# Altium PCB 8x8v2.PcbDoc (part 3 of 3)
Units mil, origin at the board's own origin, x right, y up, seen from the top; angles counter-clockwise.
Board outline 3661.42 x 3661.42 mil, 4 copper layers (Top Layer, VCC Plane, GND Plane, Bottom Layer), stack 30.635 mil thick; 389 components, 265 nets, 1171 pads, 321 vias.
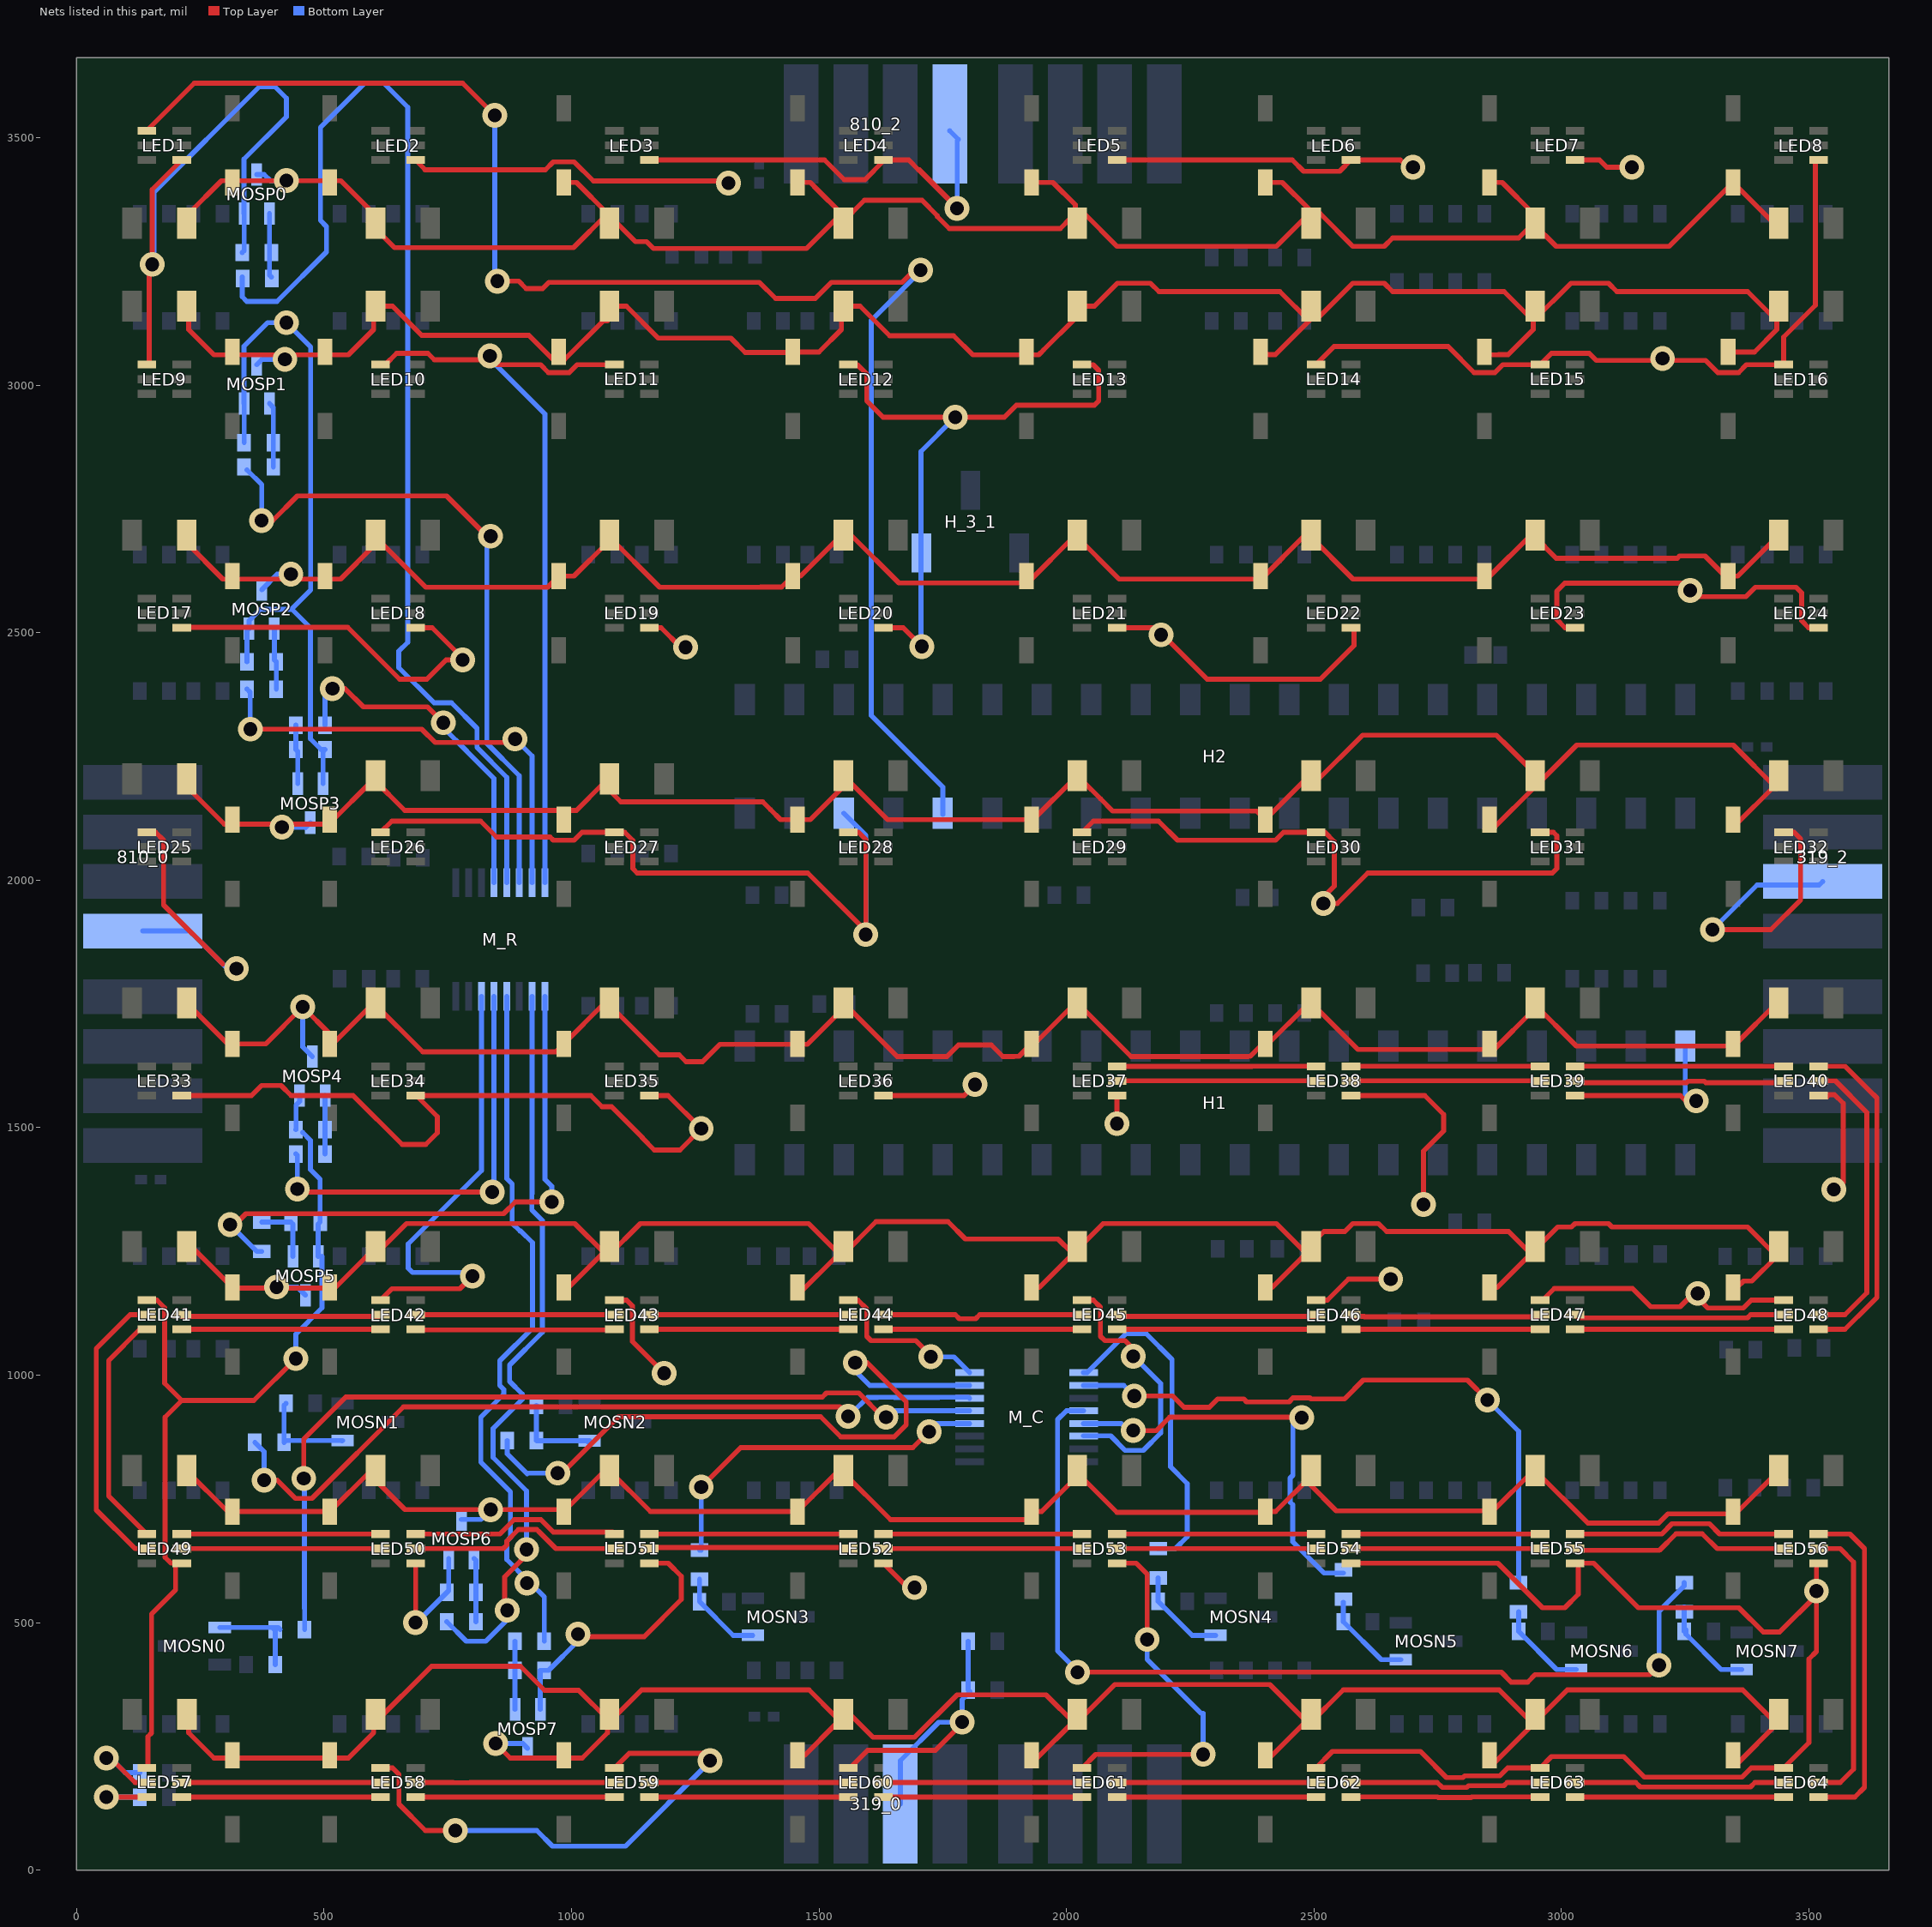
[diagram p5: the nets of this part, all layers, seen from the top]

## Via types
v1: diameter 50, hole 28, Top Layer to Bottom Layer, 321 vias

## Nets (pads, with @x,y where several pads share a name; then routed paths per layer and width w, separated by ;. In a path a pad name is that pad's centre, name@x,y a point inside that pad or via, vN(x,y) a via of type N, cw(c..) or ccw(c..) an arc to the next point about the centre after c; other vN are vias at no path point) (continued)
NetLED37_CKO: LED37.CKO LED38.CKI | length 401.6
  Top Layer w10: LED37.CKO@2102.36,1594.49 LED38.CKI@2503.94,1594.49
NetLED37_SDO: LED37.SDO LED38.SDI | length 401.8
  Top Layer w10: LED37.SDO@2102.36,1624.02 2102.68,1623.7 2374.77,1623.7 2375.09,1624.02 LED38.SDI@2503.94,1624.02
NetLED38_CKO: LED38.CKO LED39.CKI | length 381.9
  Top Layer w10: LED38.CKO@2574.8,1594.49 LED39.CKI@2956.7,1594.49
NetLED38_SDO: LED38.SDO LED39.SDI | length 381.9
  Top Layer w10: LED38.SDO@2574.8,1624.02 LED39.SDI@2956.7,1624.02
NetLED39_CKO: LED39.CKO LED40.CKI | length 426.7
  Top Layer w10: LED39.CKO@3027.56,1594.49 3031.06,1590.98 3252.42,1590.98 3255.43,1594 3288.57,1594 3291.58,1590.98 3445.32,1590.98 LED40.CKI@3448.82,1594.49
NetLED39_SDO: LED39.SDO LED40.SDI | length 421.3
  Top Layer w10: LED39.SDO@3027.56,1624.02 LED40.SDI@3448.82,1624.02
NetLED40_CKO: LED40.CKO LED48.CKI | length 603.7
  Top Layer w10: LED48.CKI@3519.68,1122.05 3572.62,1122.05 3617,1166.43 3617,1530.64 3553.15,1594.49 LED40.CKO@3519.68,1594.49
NetLED40_SDO: LED40.SDO LED48.SDI | length 691
  Top Layer w10: LED48.SDI@3519.68,1092.52 3572.83,1092.52 3622.05,1141.73 3637,1156.68 3637,1559.85 3622.05,1574.8 3572.83,1624.02 LED40.SDO@3519.68,1624.02
NetLED41_CKI: LED41.CKI LED42.CKO | length 406.1
  Top Layer w10: LED41.CKI@212.6,1122.05 212.6,1118.86 610.99,1118.86 LED42.CKO@614.18,1122.05
NetLED41_CKO: LED41.CKO LED49.CKI | length 590.2
  Top Layer w10: LED49.CKI@141.74,649.61 118.11,649.61 40,727.72 40,1053.78 108.27,1122.05 LED41.CKO@141.74,1122.05
NetLED41_SDI: LED41.SDI LED42.SDO | length 401.6
  Top Layer w10: LED41.SDI@212.6,1092.52 LED42.SDO@614.18,1092.52
NetLED41_SDO: LED41.SDO LED49.SDI | length 485
  Top Layer w10: LED49.SDI@141.74,679.14 65,755.87 65,1029.57 127.95,1092.52 LED41.SDO@141.74,1092.52
NetLED42_CKI: LED42.CKI LED43.CKO | length 406.1
  Top Layer w10: LED42.CKI@685.04,1122.05 685.04,1118.86 694.89,1118.86 698.08,1122.05 LED43.CKO@1086.62,1122.05
NetLED42_SDI: LED42.SDI LED43.SDO | length 402.4
  Top Layer w10: LED42.SDI@685.04,1092.52 685.98,1091.58 1085.68,1091.58 LED43.SDO@1086.62,1092.52
NetLED43_CKI: LED43.CKI LED44.CKO | length 401.6
  Top Layer w10: LED43.CKI@1157.48,1122.05 LED44.CKO@1559.06,1122.05
NetLED43_SDI: LED43.SDI LED44.SDO | length 401.6
  Top Layer w10: LED43.SDI@1157.48,1092.52 LED44.SDO@1559.06,1092.52
NetLED44_CKI: LED44.CKI LED45.CKO | length 408.2
  Top Layer w10: LED44.CKI@1629.92,1122.05 1775.38,1122.05 1783.43,1114 1816.57,1114 1824.62,1122.05 LED45.CKO@2031.5,1122.05
NetLED44_SDI: LED44.SDI LED45.SDO | length 387.9
  Top Layer w10: LED44.SDI@1643.62,1092.52 LED45.SDO@2031.5,1092.52
NetLED45_CKI: LED45.CKI LED46.CKO | length 406.1
  Top Layer w10: LED45.CKI@2102.36,1122.05 2102.36,1118.86 2500.75,1118.86 LED46.CKO@2503.94,1122.05
NetLED45_SDI: LED45.SDI LED46.SDO | length 401.6
  Top Layer w10: LED45.SDI@2102.36,1092.52 LED46.SDO@2503.94,1092.52
NetLED46_CKI: LED46.CKI LED47.CKO | length 387.1
  Top Layer w10: LED46.CKI@2574.8,1122.05 2574.8,1118.86 2601.29,1118.86 2602.15,1118 2952.65,1118 LED47.CKO@2956.7,1122.05
NetLED46_SDI: LED46.SDI LED47.SDO | length 381.9
  Top Layer w10: LED46.SDI@2574.8,1092.52 LED47.SDO@2956.7,1092.52
NetLED47_CKI: LED47.CKI LED48.CKO | length 426.6
  Top Layer w10: LED47.CKI@3027.56,1122.05 3034.01,1115.59 3375.72,1115.59 3382.18,1122.05 LED48.CKO@3448.82,1122.05
NetLED47_SDI: LED47.SDI LED48.SDO | length 421.3
  Top Layer w10: LED47.SDI@3027.56,1092.52 LED48.SDO@3448.82,1092.52
NetLED49_CKO: LED49.CKO LED50.CKI | length 401.6
  Top Layer w10: LED49.CKO@212.6,649.61 LED50.CKI@614.18,649.61
NetLED49_SDO: LED49.SDO LED50.SDI | length 401.6
  Top Layer w10: LED49.SDO@212.6,679.14 LED50.SDI@614.18,679.14
NetLED50_CKO: LED50.CKO LED51.CKI | length 438.1
  Top Layer w10: LED50.CKO@685.04,649.61 862.04,649.61 869,656.57 869,664.57 892.43,688 929.83,688 934.49,683.34 968.22,649.61 LED51.CKI@1086.62,649.61
NetLED50_SDO: LED50.SDO LED51.SDI | length 425.5
  Top Layer w10: LED50.SDO@685.04,679.14 855.28,679.14 884.15,708 938.11,708 954.49,691.62 963.27,682.83 1082.92,682.83 LED51.SDI@1086.62,679.14
NetLED51_CKO: LED51.CKO LED52.CKI | length 403.6
  Top Layer w10: LED51.CKO@1157.48,649.61 1159.87,652 1556.66,652 LED52.CKI@1559.06,649.61
NetLED51_SDO: LED51.SDO LED52.SDI | length 401.6
  Top Layer w10: LED51.SDO@1157.48,679.14 LED52.SDI@1559.06,679.14
NetLED52_CKO: LED52.CKO LED53.CKI | length 401.6
  Top Layer w10: LED52.CKO@1629.92,649.61 LED53.CKI@2031.5,649.61
NetLED52_SDO: LED52.SDO LED53.SDI | length 401.6
  Top Layer w10: LED52.SDO@1629.92,679.14 LED53.SDI@2031.5,679.14
NetLED53_CKO: LED53.CKO LED54.CKI | length 401.6
  Top Layer w10: LED53.CKO@2102.36,649.61 LED54.CKI@2503.94,649.61
NetLED53_SDO: LED53.SDO LED54.SDI | length 401.6
  Top Layer w10: LED53.SDO@2102.36,679.14 LED54.SDI@2503.94,679.14
NetLED54_CKO: LED54.CKO LED55.CKI | length 381.9
  Top Layer w10: LED54.CKO@2574.8,649.61 LED55.CKI@2956.7,649.61
NetLED54_SDO: LED54.SDO LED55.SDI | length 381.9
  Top Layer w10: LED54.SDO@2574.8,679.14 LED55.SDI@2956.7,679.14
NetLED55_CKO: LED55.CKO LED56.CKI | length 449.2
  Top Layer w10: LED55.CKO@3027.56,649.61 3031.06,646.1 3197.8,646.1 3231.46,679.76 3284.28,679.76 3314.44,649.61 LED56.CKI@3448.82,649.61
NetLED55_SDO: LED55.SDO LED56.SDI | length 438.4
  Top Layer w10: LED55.SDO@3027.56,679.14 3202.55,679.14 3223.18,699.76 3298.71,699.76 3319.34,679.14 LED56.SDI@3448.82,679.14
NetLED56_CKO: LED56.CKO LED64.CKI | length 581.4
  Top Layer w10: LED64.CKI@3519.68,177.17 3562.99,177.17 3590,204.17 3590,622.6 3562.99,649.61 LED56.CKO@3519.68,649.61
NetLED56_SDO: LED56.SDO LED64.SDI | length 687.6
  Top Layer w10: LED64.SDI@3519.68,147.64 3592.52,147.64 3612.07,167.19 3612.07,649.74 3582.68,679.14 LED56.SDO@3519.68,679.14
NetLED57_CKI: LED57.CKI LED58.CKO | length 401.6
  Top Layer w10: LED57.CKI@212.6,177.17 LED58.CKO@614.18,177.17
NetLED57_CKO: LED57.CKO ROUT0.2 | length 164.5
  Top Layer w10: v1@68.9,226.38 118.11,177.17 LED57.CKO@141.74,177.17
  Bottom Layer w10: v1@68.9,226.38 98.42,196.85 ROUT0.2@127.95,196.85
  other v1: 60,226.38
NetLED57_SDI: LED57.SDI LED58.SDO | length 401.6
  Top Layer w10: LED57.SDI@212.6,147.64 LED58.SDO@614.18,147.64
NetLED57_SDO: LED57.SDO ROUT1.2 | length 151.6
  Top Layer w10: v1@59.06,147.64 LED57.SDO@141.74,147.64
  Bottom Layer w10: v1@59.06,147.64 v1(60,147.64) ROUT1.2@127.95,147.64
NetLED58_CKI: LED58.CKI LED59.CKO | length 402.1
  Top Layer w10: LED58.CKI@685.04,177.17 760.36,177.17 760.99,176.54 794.13,176.54 794.76,177.17 LED59.CKO@1086.62,177.17
NetLED58_SDI: LED58.SDI LED59.SDO | length 401.6
  Top Layer w10: LED58.SDI@685.04,147.64 LED59.SDO@1086.62,147.64
NetLED59_CKI: LED59.CKI LED60.CKO | length 401.6
  Top Layer w10: LED59.CKI@1157.48,177.17 LED60.CKO@1559.06,177.17
NetLED59_SDI: LED59.SDI LED60.SDO | length 401.6
  Top Layer w10: LED59.SDI@1157.48,147.64 LED60.SDO@1559.06,147.64
NetLED60_CKI: LED60.CKI LED61.CKO | length 401.6
  Top Layer w10: LED60.CKI@1629.92,177.17 LED61.CKO@2031.5,177.17
NetLED60_SDI: LED60.SDI LED61.SDO | length 401.6
  Top Layer w10: LED60.SDI@1629.92,147.64 LED61.SDO@2031.5,147.64
NetLED61_CKI: LED61.CKI LED62.CKO | length 401.6
  Top Layer w10: LED61.CKI@2102.36,177.17 LED62.CKO@2503.94,177.17
NetLED61_SDI: LED61.SDI LED62.SDO | length 401.6
  Top Layer w10: LED61.SDI@2102.36,147.64 LED62.SDO@2503.94,147.64
NetLED62_CKI: LED62.CKI LED63.CKO | length 390.3
  Top Layer w10: LED62.CKI@2574.8,177.17 2748.98,177.17 2759.15,167 2808.85,167 2812.56,170.71 2883.59,170.71 2890.05,177.17 LED63.CKO@2956.7,177.17
NetLED62_SDI: LED62.SDI LED63.SDO | length 383.5
  Top Layer w10: LED62.SDI@2574.8,147.64 2575.43,148.27 2749.6,148.27 2750.86,147 2817.14,147 2818.4,148.27 2956.06,148.27 LED63.SDO@2956.7,147.64
NetLED63_CKI: LED63.CKI LED64.CKO | length 428.9
  Top Layer w10: LED63.CKI@3027.56,177.17 3149.98,177.17 3159.15,168 3381.8,168 3390.96,177.17 LED64.CKO@3448.82,177.17
NetLED63_SDI: LED63.SDI LED64.SDO | length 421.3
  Top Layer w10: LED63.SDI@3027.56,147.64 LED64.SDO@3448.82,147.64
NetM_C_1: M_C.1 Rci4.1 | length 675.2
  Bottom Layer w10: M_C.1@2034.29,1005.35 2041.79,1005.35 2120.43,1084 2160.57,1084 2213,1031.57 2213,914.57 2210,911.57 2210,815 2244,781 2244,673.61 2220,649.61 Rci4.1@2185.04,649.61
NetM_C_2: M_C.2 Rci6.1 | length 1275.6
  Top Layer w10: v1(2137,958) 2214.43,958 2237.43,935 2288.57,935 2305.57,952 2358.01,952 2364.03,945.98 2449.42,945.98 2457.43,954 2491.57,954 2493.57,952 2561.57,952 2599.57,990 2810,990 v1(2850,950)
  Bottom Layer w10: M_C.2@2034.29,979.35 2115.65,979.35 v1(2137,958) ; v1(2850,950) 2913.39,886.61 Rci6.1@2913.39,580.71
NetM_C_4: M_C.4 Rci7.1 | length 1986.3
  Top Layer w10: v1@2011.73,410 2021.73,400 v1(2022,400) 2878.43,400 2898.43,380 2931.57,380 2946.57,395 3178,395 v1(3197,414)
  Bottom Layer w10: v1(2022,400) 2022,402.85 1982,442.85 1982,910.35 2000,928.35 M_C.4@2034.29,928.35 ; v1(3197,414) 3197,523.33 3215.31,541.64 3224.1,550.43 3248,574.33 Rci7.1@3248.03,580.71
NetM_C_5: M_C.5 Rci5.1 | length 859.2
  Top Layer w10: v1@2125,888 v1(2135,888) 2181.43,888 2208.43,915 2474,915 v1(2475,914)
  Bottom Layer w10: M_C.5@2034.29,902.35 2110.65,902.35 v1@2125,888 ; v1(2475,914) 2457.54,914 2457.54,797.65 2451.54,791.65 2451.54,743.79 2457,738.32 2457,663.39 2520,600.39 Rci5.1@2559.06,600.39
NetM_C_12: M_C.12 Rci3.1 | length 732.9
  Top Layer w10: v1(1262,774) 1341.58,853.58 1689.58,853.58 1721.82,885.83 v1(1722.44,885.83)
  Bottom Layer w10: Rci3.1@1258.52,646.85 1262,646.85 v1(1262,774) ; v1(1722.44,885.83) 1722.44,897.44 1727.35,902.35 M_C.12@1804.29,902.35
NetM_C_13: M_C.13 Rci0.1 | length 1802.6
  Top Layer w10: v1(459,791) 459,871 543.98,955.98 1506.82,955.98 1514.84,964 1580.43,964 1629.08,915.35 v1(1635.35,915.35)
  Bottom Layer w10: v1(459,791) 460.35,789.65 460.35,529.24 460.63,529.53 Rci0.1@460.63,486.22 ; M_C.13@1804.29,928.35 1648.35,928.35 v1(1635.35,915.35) ; v1(1635.35,915.35) 1635.35,918.34 1633.86,916.85 v1(1635.35,915.35)
NetM_C_14: M_C.14 Rci1.1 | length 1630.7
  Top Layer w10: v1(379,788) 405.43,788 442.43,751 475.57,751 660.55,935.98 1542.25,935.98 1559,919.24 v1(1559,917)
  Bottom Layer w10: Rci1.1@360.24,864.17 379,845.41 v1(379,788) ; v1(1559,917) 1559,919.94 1563,923.94 1564.96,921.98 1597.98,955 1618.43,955 1618.78,955.35 1651.92,955.35 1652.27,955 1741.85,955 1742.21,955.35 1802.29,955.35 M_C.14@1804.29,953.35
NetM_C_15: M_C.15 Rci2.1 | length 1386.4
  Top Layer w10: v1(972,802) 981,802 1094.98,915.98 1503.45,915.98 1544.08,875.35 1651.92,875.35 1676,899.43 1676,946.43 1597.43,1025 v1(1573,1025)
  Bottom Layer w10: Rci2.1@870.08,868.11 870.08,841.28 910.36,801 911.36,802 v1(972,802) ; v1@1572.88,1045.23 1573,1045.11 v1(1573,1025) 1573,1008.79 1602.43,979.35 M_C.15@1804.29,979.35
NetM_R_1: M_R.1 Rin5.2 | length 1190
  Top Layer w10: v1@306.75,1313 v1@310.57,1309.17 ; v1(310.17,1304) 310.17,1308.43 310,1308.6 v1@310.57,1309.17 ; v1(960,1350) 886.57,1350 862.91,1326.34 342.09,1326.34 317.75,1302 v1@310.57,1309.17
  Bottom Layer w10: v1(310.17,1304) 364.17,1250 Rin5.2@374.02,1250 ; M_R.1@946.3,1764.92 946.3,1395.3 960,1381.6 v1(960,1350)
NetM_R_2: M_R.2 Rin6.2 | length 1539.9
  Top Layer w10: v1@866.14,531.5 865,532.64 865,592.57 896.43,624 896.43,624.43 909,637 v1(909,648)
  Bottom Layer w10: Rin6.2@748.03,501.97 787.4,462.6 826.77,462.6 875,510.83 870,515.83 v1(870,525) 870,528.65 866.65,532 v1@866.14,531.5 ; v1(909,648) 909,766.07 841.3,833.77 841.3,892.04 900.35,951.1 900.35,962.08 875,987.43 875,1020.57 941,1086.57 941,1312.43 920,1333.43 920,1366.57 920.3,1366.87 M_R.2@920.3,1764.92
NetM_R_4: M_R.4 Rin7.2 | length 1440.1
  Bottom Layer w10: M_R.4@869.3,1764.92 869.3,1397.27 880,1386.57 880,1307 896,1291 897.57,1291 921,1267.57 921,1094.85 855,1028.85 855,979.15 863.3,970.85 863.3,961.73 816.93,915.35 816.93,824.29 876.61,764.6 876.61,672.18 869,664.57 869,627.43 912.43,584 910,581.57 v1(910,580) 917,580 944.88,552.12 Rin7.2@944.88,462.6
NetM_R_5: M_R.5 Rin4.2 | length 893
  Top Layer w10: v1(446,1376) 446,1365.02 451.02,1360 461.02,1370 v1(840,1370)
  Bottom Layer w10: Rin4.2@442.91,1446.85 446,1443.76 v1(446,1376) ; v1(840,1370) 840,1366.6 843.3,1363.3 M_R.5@843.3,1764.92
NetM_R_12: M_R.12 Rin3.2 | length 698.3
  Top Layer w10: v1(517,2387) 542.4,2387 579.4,2350 709,2350 v1(741,2318)
  Bottom Layer w10: Rin3.2@501.97,2312.99 501.97,2371.97 v1(517,2387) ; v1(741,2318) 741,2308 789,2260 789,2259.69 843.3,2205.39 M_R.12@843.3,1994.92
NetM_R_13: M_R.13 Rin0.2 | length 2431
  Bottom Layer w10: Rin0.2@334.65,3218.5 334.65,3178.35 344,3169 405,3169 505,3269 505,3320.24 492.76,3332.49 492.76,3520.76 582,3610 620.57,3610 669,3561.57 669,2480.57 651,2462.57 651,2429.43 722.43,2358 757.57,2358 809,2306.57 809,2267.98 869.3,2207.68 M_R.13@869.3,1994.92
NetM_R_14: M_R.14 Rin1.2 | length 1350.8
  Top Layer w10: v1(374.02,2726.38) 396.19,2726.38 446.03,2776.22 747.4,2776.22 v1@829,2694.62
  Bottom Layer w10: Rin1.2@344.49,2828.74 374.02,2799.21 v1(374.02,2726.38) ; v1@829,2694.62 829,2276.26 894.3,2210.96 M_R.14@894.3,1994.92
  other v1: 836.61,2694.62
NetM_R_15: M_R.15 Rin2.2 | length 936.9
  Top Layer w10: v1(351,2305) 697.43,2305 724.43,2278 879,2278 v1(886,2285)
  Bottom Layer w10: Rin2.2@344.49,2385.83 351,2379.32 v1(351,2305) ; v1(886,2285) 920.3,2250.7 M_R.15@920.3,1994.92
NetMOSN0_1: MOSN0.1 Rcg0.1 Rci0.2 | length 200.6
  Bottom Layer w10: MOSN0.1@289.37,490.16 397.64,490.16 397.64,488 Rci0.2@401.58,488 ; Rcg0.1@401.57,415.35 Rci0.2@401.58,488 ; Rci0.2@411.42,486.22 407.48,490.16 401.58,490.16 Rci0.2@401.58,488
NetMOSN1_1: MOSN1.1 Rcg1.1 Rci1.2 | length 201.7
  Bottom Layer w10: Rcg1.1@423.23,942.91 419.29,938.98 Rci1.2@419.29,864.17 423.23,868.11 MOSN1.1@537.4,868.11 MOSN1.1@536.28,866.99
NetMOSN2_1: MOSN2.1 Rcg2.1 Rci2.2 | length 182.2
  Bottom Layer w10: Rcg2.1@929.13,938.98 Rci2.2@929.13,868.11 929.79,867.46 MOSN2.1@1036.42,867.46 MOSN2.1@1033.74,864.79
NetMOSN3_1: MOSN3.1 Rcg3.1 Rci3.2 | length 181.1
  Bottom Layer w10: Rci3.2@1258.52,587.79 Rcg3.1@1258.52,542.52 1326.62,474.41 MOSN3.1@1366.14,474.41
NetMOSN4_1: MOSN4.1 Rcg4.1 Rci4.2 | length 191.9
  Bottom Layer w10: Rci4.2@2185.04,590.55 Rcg4.1@2185.04,543.31 2253.93,474.41 MOSN4.1@2301.18,474.41
NetMOSN5_1: MOSN5.1 Rcg5.1 Rci5.2 | length 187.3
  Bottom Layer w10: Rci5.2@2559.05,541.34 Rcg5.1@2559.06,501.97 2635.83,425.2 MOSN5.1@2675.2,425.2
NetMOSN6_1: MOSN6.1 Rcg6.1 Rci6.2 | length 187.3
  Bottom Layer w10: Rci6.2@2913.39,521.65 Rcg6.1@2913.39,482.28 2990.16,405.51 MOSN6.1@3029.53,405.51
NetMOSN7_1: MOSN7.1 Rcg7.1 Rci7.2 | length 204.9
  Bottom Layer w10: Rcg7.1@3248.03,482.28 Rcg7.1@3248.03,488.63 ; Rci7.2@3248.03,531.49 Rcg7.1@3248.03,488.63 ; MOSN7.1@3364.17,405.51 3322.49,405.51 3251.2,476.8 3251.2,485.46 Rcg7.1@3248.03,488.63
NetMOSP0_1: MOSP0.1 Rin0.1 Rvs0.2 | length 129.6
  Bottom Layer w10: MOSP0.1@389.76,3346.46 389.76,3222.44 Rin0.1@393.7,3218.5
NetMOSP1_1: MOSP1.1 Rin1.1 Rvs1.2 | length 131.2
  Bottom Layer w10: MOSP1.1@389.76,2962.6 397.64,2954.72 Rin1.1@397.64,2834.65
NetMOSP2_1: MOSP2.1 Rin2.1 Rvs2.2 | length 123.7
  Bottom Layer w10: MOSP2.1@399.61,2507.87 399.6,2444.89 Rvs2.2@403.54,2440.94 Rin2.1@403.54,2385.83
NetMOSP3_1: MOSP3.1 Rin3.1 Rvs3.2 | length 119.7
  Bottom Layer w10: Rin3.1@442.91,2312.99 Rvs3.2@442.91,2263.78 446.85,2259.84 MOSP3.1@446.85,2194.88
NetMOSP4_1: MOSP4.1 Rin4.1 Rvs4.2 | length 118.1
  Bottom Layer w10: Rin4.1@501.97,1446.85 Rvs4.2@501.97,1496.06 MOSP4.1@501.97,1564.96
NetMOSP5_1: MOSP5.1 Rin5.1 Rvs5.2 | length 129.6
  Bottom Layer w10: Rin5.1@374.02,1309.06 Rvs5.2@433.07,1309.06 437.01,1305.12 MOSP5.1@437.01,1240.16
NetMOSP6_1: MOSP6.1 Rin6.1 Rvs6.2 | length 129.6
  Bottom Layer w10: MOSP6.1@803.15,629.92 807.09,625.98 Rvs6.2@807.09,561.02 Rin6.1@807.09,501.97
NetMOSP7_1: MOSP7.1 Rin7.1 Rvs7.2 | length 137.8
  Bottom Layer w10: MOSP7.1@885.83,324.8 Rin7.1@885.83,462.6
ROW0: IR1.1 IR2.1 IR3.1 IR4.1 IR5.1 IR6.1 IR7.1 IR8.1 MOSP0.3 PT1.1 PT2.1 PT3.1 PT4.1 PT5.1 PT6.1 PT7.1 PT8.1 | length 4365.2
  Top Layer w10: IR1.1@226.38,3346.46 292.92,3413 v1(424,3413) 533.85,3413 600.39,3346.46 600.39,3319.42 642.25,3277.56 1003.94,3277.56 IR3.1@1072.83,3346.46 ; PT3.1@984.25,3409.45 1009.84,3409.45 IR3.1@1072.83,3346.46 ; PT4.1@1456.69,3409.45 1482.28,3409.45 1496.06,3395.67 IR4.1@1545.28,3346.46 ; IR4.1@1545.28,3326.77 1591.77,3373.27 1707.96,3373.27 1739,3342.23 1739,3340.43 1763.13,3316.3 1987.56,3316.3 IR5.1@2007.87,3336.61 ; IR4.1@1555.12,3336.61 IR4.1@1545.28,3346.46 ; PT5.1@1929.13,3409.45 1972.44,3409.45 2017.72,3364.17 IR5.1@2017.72,3346.46 ; IR5.1@2017.72,3326.77 IR5.1@2007.87,3336.61 ; PT6.1@2401.57,3409.45 2435.84,3409.45 2490.16,3355.13 IR6.1@2490.16,3346.46 ; PT7.1@2854.33,3409.45 2879.92,3409.45 2942.91,3346.46 IR7.1@2942.91,3326.77 ; IR8.1@3438.98,3326.77 3429.13,3326.77 PT8.1@3346.46,3409.45 3217.28,3280.28 2989.41,3280.28 IR7.1@2942.91,3326.77 ; IR3.1@1072.83,3346.46 1129.29,3290 1151.39,3290 1165.39,3276 1474.82,3276 IR4.1@1545.28,3346.46 ; IR5.1@2007.87,3336.61 IR5.1@2017.72,3346.46 ; IR5.1@2017.72,3346.46 2035.87,3346.46 2102.05,3280.28 2423.98,3280.28 IR6.1@2490.16,3346.46 ; IR6.1@2490.16,3346.46 2512.25,3346.46 2578.43,3280.28 2630.23,3280.28 2642.04,3280.28 2659.01,3297.24 2913.39,3297.24 IR7.1@2942.91,3326.77
  Bottom Layer w10: MOSP0.3@364.17,3425.2 379.15,3425.2 391.35,3413 v1(424,3413)
ROW1: IR9.1 IR10.1 IR11.1 IR12.1 IR13.1 IR14.1 IR15.1 IR16.1 MOSP1.3 PT9.1 PT10.1 PT11.1 PT12.1 PT13.1 PT14.1 PT15.1 PT16.1 | length 4184.4
  Top Layer w10: IR9.1@226.38,3129.92 226.38,3112.21 277.56,3061.02 549.21,3061.02 600.39,3112.21 IR10.1@600.39,3129.92 ; IR10.1@600.39,3159.45 638.24,3159.45 697.29,3100.39 913.88,3100.39 962.46,3051.81 986.36,3051.81 1064.47,3129.92 IR11.1@1072.83,3129.92 ; IR11.1@1072.83,3159.45 1110.68,3159.45 1175.13,3095 1321.8,3095 1350.86,3065.94 1445.87,3065.94 PT12.1@1446.85,3066.93 1500,3066.93 1545.28,3112.21 IR12.1@1545.28,3129.92 ; IR12.1@1545.28,3159.45 1583.12,3159.45 1642.81,3099.76 1771.98,3099.76 1810.72,3061.02 1943.9,3061.02 1953.74,3070.87 ; 1948.82,3065.94 1953.74,3070.87 ; PT14.1@2391.73,3066.93 2401.5,3066.93 2401.5,3061.48 2421.72,3061.48 IR14.1@2490.16,3129.92 ; PT15.1@2844.49,3061.02 2872.85,3061.02 2873.17,3061.34 2892.05,3061.34 2942.91,3112.21 IR15.1@2942.91,3129.92 ; PT16.1@3336.61,3066.93 3389.76,3066.93 3435.04,3112.21 3435.04,3129.92 3375.99,3188.98 3111.76,3188.98 3094.8,3205.94 3018.94,3205.94 IR15.1@2942.91,3129.92 ; 1953.74,3070.87 2017.72,3134.84 2017.72,3159.45 2056.3,3159.45 2102.8,3205.94 2169.6,3205.94 2186.57,3188.98 2431.1,3188.98 IR14.1@2490.16,3129.92 ; IR14.1@2490.16,3129.92 2495.08,3134.84 2507.33,3134.84 2578.43,3205.94 2642.04,3205.94 2659.01,3188.98 2883.86,3188.98 IR15.1@2942.91,3129.92
  Bottom Layer w10: MOSP1.3@364.17,3041.34 374.02,3051.18 374.84,3052 v1(421,3052)
ROW2: IR17.1 IR18.1 IR19.1 IR20.1 IR21.1 IR22.1 IR23.1 IR24.1 MOSP2.3 PT17.1 PT18.1 PT19.1 PT20.1 PT21.1 PT22.1 PT23.1 PT24.1 | length 3879.1
  Top Layer w10: IR17.1@222.44,2696.85 222.44,2681.1 295.28,2608.27 533.47,2608.27 600.39,2675.2 IR18.1@600.39,2696.85 ; IR18.1@604.33,2696.85 IR18.1@600.39,2696.85 ; PT19.1@982.76,2614.17 PT19.1@974.41,2614.17 ; PT23.1@2844.49,2608.27 2578.74,2608.27 2490.16,2696.85 2481.85,2696.85 2393.27,2608.27 2106.3,2608.27 2017.72,2696.85 1921.26,2600.4 1661.42,2600.4 1564.96,2696.85 1545.28,2696.85 1462.6,2614.17 PT20.1@1446.85,2614.17 1424.68,2592 1381.86,2592 1381.64,2591.78 1177.91,2591.78 1072.83,2696.85 1072.83,2682.09 1004.92,2614.17 PT19.1@974.41,2614.17 ; PT23.1@2844.49,2614.17 2855.17,2614.17 2935.88,2694.88 IR23.1@2944.88,2694.88 ; IR23.1@2946.85,2696.85 IR23.1@2944.88,2694.88 ; PT24.1@3336.61,2608.27 3289.88,2655 3238.43,2655 3233.79,2650.35 2989.41,2650.35 IR23.1@2944.88,2694.88 ; PT24.1@3336.61,2614.17 3356.3,2614.17 IR24.1@3438.98,2696.85 ; IR18.1@600.39,2696.85 705.47,2591.78 952.01,2591.78 PT19.1@974.41,2614.17
  Bottom Layer w10: MOSP2.3@374.02,2586.61 405.51,2618.11 v1(433.07,2618.11)
ROW3: IR25.1 IR26.1 IR27.1 IR28.1 IR29.1 IR30.1 IR31.1 IR32.1 MOSP3.3 PT25.1 PT26.1 PT27.1 PT28.1 PT29.1 PT30.1 PT31.1 PT32.1 | length 3973.1
  Top Layer w10: IR25.1@226.38,2185.04 298.42,2113 509.79,2113 600.39,2203.61 663,2141 1010,2141 1063.44,2194.44 1099.65,2158.23 1386.34,2158.23 1402,2142.57 1402,2142.47 1422.43,2122.05 1482.28,2122.05 IR28.1@1560.26,2200.02 ; PT27.1@987.83,2135.83 PT27.1@988,2136 ; IR28.1@1549.21,2211.06 IR28.1@1560.26,2200.02 ; PT31.1@2865.16,2107.28 IR31.1@2942.91,2185.04 ; PT32.1@3356.3,2116.14 3425.2,2185.04 3435.04,2185.04 3347.08,2273 3030.87,2273 2959.72,2201.85 2893,2268.57 2868.57,2293 2598.12,2293 2503.06,2197.94 2489.94,2211.06 2489.94,2210.41 PT30.1@2401.57,2122.05 2384.29,2139.33 2093.38,2139.33 2068.72,2164 2032.7,2200.02 IR29.1@2021.65,2211.06 1932.64,2122.05 PT29.1@1929.13,2122.05 1638.23,2122.05 IR28.1@1560.26,2200.02
  Bottom Layer w10: v1(415,2107) 461.9,2107 462.6,2106.3 MOSP3.3@472.44,2116.14
ROW4: IR33.1 IR34.1 IR35.1 IR36.1 IR37.1 IR38.1 IR39.1 IR40.1 MOSP4.3 PT33.1 PT34.1 PT35.1 PT36.1 PT37.1 PT38.1 PT39.1 PT40.1 | length 4029.4
  Top Layer w10: IR33.1@222.44,1751.97 305.12,1669.29 382.29,1669.29 v1(457,1744) 511.81,1689.19 PT34.1@511.81,1669.29 517.72,1669.29 IR34.1@600.39,1751.97 ; IR34.1@604.33,1751.97 IR34.1@600.39,1751.97 ; IR35.1@1072.83,1737.2 IR35.1@1072.83,1751.97 ; IR35.1@1076.77,1751.97 IR35.1@1072.83,1751.97 ; PT37.1@1929.13,1669.29 1903.86,1644.02 1894.36,1644.02 1894.05,1643.7 1871.44,1643.7 1848.14,1667 1781.86,1667 1758.56,1643.7 1658.02,1643.7 1549.76,1751.97 1545.28,1751.97 1545.28,1737.2 1476.38,1668.31 1299.88,1668.31 1264.57,1633 1231.43,1633 1217.43,1647 1177.8,1647 IR35.1@1072.83,1751.97 ; PT37.1@1932.09,1666.34 2017.72,1751.97 2022.2,1751.97 2130.47,1643.7 2366.49,1643.7 2366.8,1644.02 2371.02,1644.02 2393,1666 PT38.1@2400.93,1666 ; PT38.1@2402.56,1664.37 2490.16,1751.97 2494.64,1751.97 2588.61,1658 2863.71,1658 2942.91,1737.2 2942.91,1751.97 3029.88,1665 3342.17,1665 PT40.1@3346.46,1669.29 3352.36,1669.29 IR40.1@3435.04,1751.97 ; IR34.1@600.39,1751.97 699.45,1652.91 967.87,1652.91 PT35.1@984.25,1669.29 1066.93,1751.97 IR35.1@1072.83,1751.97
  Bottom Layer w10: v1(457,1744) 457,1663.08 MOSP4.3@476.38,1643.7
ROW5: IR41.1 IR42.1 IR43.1 IR44.1 IR45.1 IR46.1 IR47.1 IR48.1 MOSP5.3 PT41.1 PT42.1 PT43.1 PT44.1 PT45.1 PT46.1 PT47.1 PT48.1 | length 4416.5
  Top Layer w10: IR41.1@222.44,1259.84 232.28,1259.84 PT41.1@314.96,1177.17 ; PT41.1@317.73,1176 522,1176 586.16,1240.16 600.39,1240.16 666.57,1306.34 1006.65,1306.34 IR43.1@1064.96,1248.03 ; PT43.1@984.25,1177.17 994.09,1177.17 IR43.1@1064.96,1248.03 ; IR43.1@1076.77,1259.84 IR43.1@1064.96,1248.03 ; PT44.1@1462.46,1167.46 1535.16,1240.16 IR44.1@1545.28,1240.16 ; PT45.1@1929.13,1177.17 1944.88,1177.17 IR45.1@2017.72,1250 ; IR45.1@2021.65,1259.84 IR45.1@2024.61,1256.89 ; PT46.1@2401.57,1177.17 2415.17,1177.17 2478.16,1240.16 IR46.1@2490.16,1240.16 ; PT47.1@2854.33,1177.17 2870.08,1177.17 IR47.1@2937.99,1245.08 ; IR47.1@2946.85,1259.84 IR47.1@2949.8,1256.89 ; PT48.1@3346.46,1177.17 3356.22,1177.17 3356.22,1178.28 3367.94,1190 3384.88,1190 3435.04,1240.16 3375.99,1299.21 3101.92,1299.21 3094.8,1306.34 3027.25,1306.34 3020.13,1299.21 2992.13,1299.21 IR47.1@2949.8,1256.89 ; IR43.1@1064.96,1248.03 1072.83,1240.16 1139.01,1306.34 1479.1,1306.34 IR44.1@1545.28,1240.16 ; IR44.1@1545.28,1240.16 1615.12,1310 1760.57,1310 1795.57,1275 1982.87,1275 2009.84,1248.03 2012.8,1245.08 2017.72,1240.16 IR45.1@2017.72,1250 ; IR45.1@2017.72,1250 IR45.1@2024.61,1256.89 ; IR45.1@2017.72,1250 IR45.1@2024.61,1256.89 ; IR45.1@2024.61,1256.89 2073.72,1306 2074.06,1306.34 2423.98,1306.34 IR46.1@2490.16,1240.16 ; IR46.1@2490.16,1240.16 2490.16,1259.84 2520.32,1290 2562.09,1290 2578.43,1306.34 2630.23,1306.34 2646.57,1290 2893.07,1290 IR47.1@2937.99,1245.08 ; IR47.1@2937.99,1245.08 2942.91,1240.16 IR47.1@2942.91,1250 ; IR47.1@2937.99,1245.08 IR47.1@2942.91,1250 ; IR47.1@2942.91,1250 IR47.1@2949.8,1256.89
  Bottom Layer w10: v1(404,1178) 446.02,1178 MOSP5.3@462.6,1161.42
ROW6: IR49.1 IR50.1 IR51.1 IR52.1 IR53.1 IR54.1 IR55.1 IR56.1 MOSP6.3 PT49.1 PT50.1 PT51.1 PT52.1 PT53.1 PT54.1 PT55.1 PT56.1 | length 3827.7
  Top Layer w10: IR49.1@222.44,807.09 305.12,724.41 PT49.1@314.96,724.41 PT50.1@511.81,724.41 594.49,807.09 IR50.1@600.39,807.09 ; IR50.1@604.33,807.09 IR50.1@600.39,807.09 ; IR52.1@1549.21,807.09 IR52.1@1545.28,807.09 ; PT53.1@1929.13,724.41 1949.8,724.41 2017.72,792.32 2017.72,807.09 2101.8,723 2390.57,723 PT54.1@2401.57,712 ; PT53.1@1930,708 1644.36,708 IR52.1@1545.28,807.09 ; PT54.1@2401.57,724.41 2422.24,724.41 IR54.1@2490.16,792.32 ; IR54.1@2490.16,807.09 IR54.1@2490.16,792.32 ; PT55.1@2854.33,724.41 2860.24,724.41 2942.91,807.09 IR55.1@2946.85,807.09 2947.39,807.09 3053.42,701.06 3196.19,701.06 3214.89,719.76 PT56.1@3346.46,719.76 ; PT55.1@2854.33,726 2544.91,726 2490.16,780.75 IR54.1@2490.16,792.32 ; PT56.1@3346.46,724.41 3356.3,724.41 IR56.1@3438.98,807.09 ; IR50.1@600.39,807.09 600.39,791.61 663.65,728.35 v1(836.61,728.35) 980.32,728.35 PT51.1@984.25,724.41 1066.93,807.09 IR51.1@1076.77,807.09 1159.45,724.41 PT52.1@1456.69,724.41 1539.37,807.09 IR52.1@1545.28,807.09
  Bottom Layer w10: MOSP6.3@777.56,708.66 816.93,708.66 v1(836.61,728.35)
ROW7: IR57.1 IR58.1 IR59.1 IR60.1 IR61.1 IR62.1 IR63.1 IR64.1 MOSP7.3 PT57.1 PT58.1 PT59.1 PT60.1 PT61.1 PT62.1 PT63.1 PT64.1 | length 4649.8
  Top Layer w10: IR57.1@226.38,295.28 226.38,277.56 277.56,226.38 549.21,226.38 600.39,277.56 600.39,295.28 717.12,412 897.06,412 945.51,363.54 1014.41,363.54 1072.83,305.12 1072.83,277.56 1021.65,226.38 875.98,226.38 v1(846.46,255.91) ; IR59.1@1072.83,295.28 1141.73,364.17 1479.79,364.17 IR60.1@1534.19,309.78 ; PT60.1@1456.69,232.28 1471.28,232.28 1534.19,295.19 IR60.1@1534.19,309.78 ; IR60.1@1545.28,298.69 IR60.1@1534.19,309.78 ; IR60.1@1549.21,314.96 IR60.1@1545.28,314.96 ; PT61.1@1935.74,221.74 IR61.1@2019,305 ; PT62.1@2403,231 2414,231 2484.22,301.22 2410.47,374.96 2097.4,374.96 2017.72,295.28 1958.66,354.33 1779.01,354.33 1693.14,268.46 1608.97,268.46 1545.28,332.16 IR60.1@1545.28,314.96 ; IR62.1@2490.16,295.28 2559.06,364.17 2874.01,364.17 IR63.1@2942.91,295.28 ; PT63.1@2865.16,217.52 IR63.1@2942.91,295.28 ; PT64.1@3357.28,217.52 3435.04,295.28 3366.14,364.17 3011.81,364.17 IR63.1@2942.91,295.28 ; IR60.1@1534.19,309.78 1539.37,314.96 IR60.1@1545.28,314.96
  Bottom Layer w10: v1(846.46,255.91) 901.57,255.91 MOSP7.3@911.42,246.06
SDI: H2.36 LED1.SDI | length 3211.3
  Top Layer w10: LED1.SDI@141.74,3513.78 237.95,3610 780,3610 v1(845,3545) ; v1(850,3210) 893.43,3210 908.43,3195 941.57,3195 954.29,3207.72 1379.43,3207.72 1412.15,3175 1492.37,3175 1525.09,3207.72 1667.72,3207.72 1692,3232 v1(1705,3232)
  Bottom Layer w10: v1(845,3545) 845,3215 v1(850,3210) ; v1(1705,3232) 1705,3230 1605.5,3130.5 1605.5,2332.5 1750,2188 H2.36@1750,2135 H2.36@1750,2132.57
VCC: 319_0.2 319_2.2 810_0.1 810_2.1 H1.1 H2.38 H_3_1.1 LED1.VCC LED2.VCC LED3.VCC LED4.VCC LED5.VCC LED6.VCC LED7.VCC LED8.VCC LED9.VCC LED10.VCC LED11.VCC LED12.VCC LED13.VCC LED14.VCC LED15.VCC LED16.VCC LED17.VCC LED18.VCC LED19.VCC LED20.VCC LED21.VCC LED22.VCC LED23.VCC LED24.VCC LED25.VCC LED26.VCC LED27.VCC LED28.VCC LED29.VCC LED30.VCC LED31.VCC LED32.VCC LED33.VCC LED34.VCC LED35.VCC LED36.VCC LED37.VCC LED38.VCC LED39.VCC LED40.VCC LED41.VCC LED42.VCC LED43.VCC LED44.VCC LED45.VCC LED46.VCC LED47.VCC LED48.VCC LED49.VCC LED50.VCC LED51.VCC LED52.VCC LED53.VCC LED54.VCC LED55.VCC LED56.VCC LED57.VCC LED58.VCC LED59.VCC LED60.VCC LED61.VCC LED62.VCC LED63.VCC LED64.VCC M_C.6 M_C.16 M_R.6 M_R.16 MOSP0.2 MOSP1.2 MOSP2.2 MOSP3.2 MOSP4.2 MOSP5.2 MOSP6.2 MOSP7.2 R200.1 R201.1 Rvs0.1 Rvs1.1 Rvs2.1 Rvs3.1 Rvs4.1 Rvs5.1 Rvs6.1 Rvs7.1 | length 29263.6
  Top Layer w10: LED57.VCC@141.74,206.7 144,206.7 144,269.8 151.46,277.25 151.46,517.54 200,566.09 LED49.VCC@200,620.08 ; LED41.VCC@141.74,1151.58 162.42,1151.58 178,1136 178,983.42 212.6,948.82 ; LED25.VCC@141.74,2096.46 159.99,2096.46 176,2080.45 176,1949.98 295.28,1830.71 ; LED9.VCC@141.74,3041.34 146.89,3046.5 146.89,3237.89 v1(153,3244) 153,3395.13 LED1.VCC@212.6,3454.72 ; LED49.VCC@212.6,620.08 190.92,620.08 178.9,632.1 178.9,915.12 212.6,948.82 ; LED33.VCC@212.6,1564.96 353.39,1564.96 373.71,1585.28 413.28,1585.28 433.6,1564.96 558.61,1564.96 657.66,1465.91 705.54,1465.91 728.98,1489.34 728.98,1522.47 LED34.VCC@686.49,1564.96 ; LED17.VCC@212.6,2509.84 212.6,2510.59 547.95,2510.59 652.54,2406 707.57,2406 746.57,2445 v1(780,2445) 780,2448.35 718.51,2509.84 LED18.VCC@685.04,2509.84 ; v1(442.91,1033.46) 358.27,948.82 212.6,948.82 ; LED58.VCC@614.18,206.7 638.3,206.7 651.34,193.66 651.34,133.55 704.88,80 v1(765,80) ; LED42.VCC@614.18,1151.58 637.05,1174.45 774.45,1174.45 v1(800,1200) ; LED26.VCC@614.18,2096.46 637.05,2119.33 816.23,2119.33 848.64,2086.93 956.82,2086.93 963.28,2080.47 1005.23,2080.47 1021.22,2096.46 LED27.VCC@1086.62,2096.46 ; LED10.VCC@614.18,3041.34 623.54,3041.34 646.41,3064.22 709.95,3064.22 722.99,3051.18 v1@826.77,3051.18 ; v1(685,500) 685,620.04 LED50.VCC@685.04,620.08 LED50.VCC@686,620.08 ; LED34.VCC@685.04,1564.96 LED34.VCC@686.49,1564.96 ; LED2.VCC@685.04,3454.72 704,3435.76 704,3435.04 947.29,3435.04 963.27,3451.02 1005.23,3451.02 1044.09,3412.16 1312.84,3412.16 v1(1317,3408) ; v1(835,3059) 835,3052.8 846.45,3041.34 937.45,3041.34 953.43,3025.35 995.39,3025.35 1011.37,3041.34 LED11.VCC@1086.62,3041.34 ; v1(1013,477) 1018.19,471.81 1146.81,471.81 1222,547 1222,593.57 1195.49,620.08 LED51.VCC@1157.48,620.08 ; LED59.VCC@1086.62,206.7 1087,206.7 1116.52,236.22 1269.68,236.22 1279.53,226.37 v1(1279.53,221.46) ; LED43.VCC@1086.62,1151.58 1111,1151.58 ; LED27.VCC@1096,2096.46 LED27.VCC@1086.62,2096.46 ; LED19.VCC@1157.48,2509.84 1181.1,2509.84 1220.47,2470.47 v1(1230.32,2470.47) ; LED3.VCC@1157.48,3454.72 1511.09,3454.72 1550.77,3415.04 1592.93,3415.04 1629.92,3452.03 LED4.VCC@1629.92,3454.72 1681.28,3454.72 1700.96,3435.04 ; LED35.VCC@1158.52,1566 LED35.VCC@1157.48,1564.96 1195.04,1564.96 v1(1262,1498) 1219,1455 1167.43,1455 1143,1479.43 1143,1480.29 1081.21,1542.08 1061.7,1542.08 1038.83,1564.96 LED34.VCC@686.49,1564.96 ; v1(1187.06,1003.94) 1123,1068 1123,1139.58 ; LED60.VCC@1559.06,206.7 1562.7,206.7 1598,242 1735,242 v1@1787.5,294.5 ; LED44.VCC@1559.06,1151.58 1578.42,1151.58 1596.22,1133.78 1596.22,1078.43 1605.01,1069.64 1695.36,1069.64 1728,1037 v1(1726,1037) ; LED28.VCC@1559.06,2096.46 1580,2096.46 1594.49,2081.97 v1@1594.49,1909.45 ; LED12.VCC@1568,3041.34 LED12.VCC@1559.06,3041.34 1577.32,3041.34 1596.22,3022.44 1596.22,2968.19 1629.41,2935 v1(1775,2935) 1874.42,2935 1898.82,2959.41 2056.41,2959.41 2065.2,2968.19 2065.2,3029.8 2053.66,3041.34 LED13.VCC@2031.5,3041.34 ; v1(1594.49,1890) 1594.49,1897.2 1477.16,2014.52 1132.56,2014.52 1123.78,2023.31 1123.78,2080.22 1107.54,2096.46 LED27.VCC@1086.62,2096.46 ; LED52.VCC@1629.92,620.08 1679.13,570.87 v1(1692.91,570.87) ; LED36.VCC@1629.92,1564.96 1792.96,1564.96 v1(1815,1587) v1@1806,1578 ; LED20.VCC@1629.92,2509.84 1670.16,2509.84 v1(1708,2472) ; v1@1780,3356 v1(1779,3357) ; LED61.VCC@2031.5,206.7 2058.8,234 v1(2276,234) ; LED45.VCC@2031.5,1151.58 2054.42,1151.58 2068.66,1137.34 2068.66,1078.43 2077.45,1069.64 2118.36,1069.64 2135,1053 v1(2135,1038) ; LED29.VCC@2031.5,2096.46 2054.37,2119.33 2185.67,2119.33 2224.53,2080.47 2422.55,2080.47 2438.54,2096.46 LED30.VCC@2503.94,2096.46 2522.2,2096.46 2541.1,2077.56 2541.1,1988 2519,1965.9 v1(2519,1953) 2547,1953 2608.52,2014.52 2981.61,2014.52 2990.4,2023.31 2990.4,2089.6 2983.54,2096.46 LED31.VCC@2956.7,2096.46 ; v1(2102,1508) 2102,1564.6 LED37.VCC@2102.36,1564.96 LED37.VCC@2103,1564.96 ; LED53.VCC@2102.36,620.08 2140.96,620.08 2163,598.04 v1@2163,470 ; LED21.VCC@2102.36,2509.84 2176.68,2509.84 v1(2191,2495.52) 2194.48,2495.52 2284,2406 2513,2406 2581,2474 LED22.VCC@2581,2509.84 ; LED5.VCC@2102.36,3454.72 2456.15,3454.72 2479.03,3431.85 2551.93,3431.85 LED6.VCC@2574.8,3454.72 2674.28,3454.72 v1@2700,3429 ; LED46.VCC@2503.94,1151.58 2527.01,1151.58 2569.43,1194 v1(2655,1194) ; LED14.VCC@2503.94,3041.34 2540.6,3078 2770.87,3078 2823.51,3025.35 2865.47,3025.35 2881.45,3041.34 LED15.VCC@2956.7,3041.34 2979.57,3064.22 3055.78,3064.22 3070,3050 3290.99,3050 3315.64,3025.35 3357.59,3025.35 3373.58,3041.34 LED16.VCC@3448.82,3041.34 3448.82,3096.9 3513,3161.08 3513,3448.04 LED8.VCC@3519.68,3454.72 ; LED62.VCC@2515,206.7 LED62.VCC@2503.94,206.7 2537.24,240 2715,240 2744,211 2744,210.43 2767.43,187 2800.57,187 2804.28,190.71 2875.31,190.71 2891.29,206.7 LED63.VCC@2956.7,206.7 2979.57,229.57 3125.86,229.57 3167.43,188 3364.73,188 3383.42,206.7 LED64.VCC@3448.82,206.7 3500,257.87 3500,426.57 3515,441.57 3515,555.43 3440.57,481 3407.43,481 3358.43,530 3155,530 3064.92,620.08 LED55.VCC@3027.56,620.08 ; LED54.VCC@2574.8,620.08 2871.61,620.08 2961.69,530 3006.57,530 3034,557.43 LED55.VCC@3034,613.63 ; LED38.VCC@2574.8,1564.96 2723.61,1564.96 2762,1526.57 2762,1493.43 2721,1452.43 v1(2721,1345) ; LED47.VCC@2956.7,1151.58 2962,1151.58 2985.42,1175 3143.4,1175 3180.4,1138 3239.6,1138 3270,1168.4 3273.4,1165 v1(3275,1165) 3275,1156.07 3295.46,1135.61 3325.46,1135.61 ; LED23.VCC@3027,2509.84 LED23.VCC@3027.56,2509.84 3027.4,2510 3006.92,2510 2990.4,2526.52 2990.4,2553.46 2990,2553.85 2990,2554.42 2990.4,2554.81 2990.4,2582.99 2990,2583.38 2990,2583.55 3006.45,2600 3245,2600 v1(3260,2585) 3260,2572.6 3372.6,2572.6 3391.78,2591.78 3473.74,2591.78 3485,2580.51 3485,2524 3499.16,2509.84 LED24.VCC@3519.68,2509.84 ; LED39.VCC@3027.56,1564.96 3240.04,1564.96 3255,1550 3259,1554 v1(3272,1554) ; LED7.VCC@3035.28,3454.72 LED7.VCC@3027.56,3454.72 3076.85,3454.72 3091.57,3440 v1(3142,3440) ; v1(3305,1900) 3423,1900 3483,1960 3483,2083.46 3470,2096.46 LED32.VCC@3448.82,2096.46 ; 3325.48,1135.59 3367.43,1135.59 3383.42,1151.58 LED48.VCC@3448.82,1151.58 ; v1(3515,564) 3515,615.39 LED56.VCC@3519.68,620.08 ; LED40.VCC@3519.68,1564.96 3522.56,1562.08 3536.31,1562.08 3540.93,1566.7 3551.59,1566.7 3569.21,1549.07 3569.21,1389.21 3555,1375 v1(3550,1375) ; 1111,1151.58 1123,1139.58 ; 1111,1151.58 1111.42,1151.58 1123,1140 1123,1139.58 ; 1700.96,3435.04 1702.76,3435.04 1779,3358.8 v1(1779,3357) ; 1700.96,3435.04 v1(1779,3357)
  Bottom Layer w10: 810_0.1@133.86,1897.24 228.74,1897.24 304.98,1821 v1(323,1821) ; v1(153,3244) 156.73,3247.73 156.73,3390.44 369.28,3602.99 400.43,3602.99 423.86,3579.56 423.86,3541.86 338.35,3456.35 338.35,3346.46 MOSP0.2@338.58,3346.46 338.58,3271.65 Rvs0.1@334.65,3267.72 ; Rvs1.1@338.58,2883.86 MOSP1.2@338.58,2980 ; MOSP1.2@338.58,2962.6 338.35,2962.83 338.35,3078.35 386,3126 v1(424,3126) 473.07,3076.93 473.07,2586.07 435.28,2548.28 435.28,2547 ; Rvs2.1@344.49,2440.94 344.49,2503.94 MOSP2.2@348.43,2507.87 348.42,2523.94 371.49,2547 435.28,2547 ; v1(442.91,1033.46) 442.91,1082.68 496.06,1135.83 MOSP5.2@496.06,1240.16 ; Rvs4.1@442.91,1496.06 443.54,1496.69 443.54,1545.91 450.79,1553.15 MOSP4.2@450.79,1564.96 ; Rvs4.1@456.69,1490.16 472.44,1474.41 472.44,1415.56 492.13,1395.87 Rvs5.1@492.13,1309.06 488.19,1305.12 MOSP5.2@488.19,1240.16 ; MOSP3.2@498.03,2194.88 498.03,2259.84 Rvs3.1@501.97,2263.78 494.09,2263.78 472.44,2285.43 472.44,2509.84 435.28,2547 ; v1(685,500) 685,498.06 685.04,498.03 751.97,564.96 MOSP6.2@751.97,629.92 ; v1(765,80) 930.07,80 961.48,48.58 1109.09,48.58 1279.53,219.02 v1(1279.53,221.46) ; v1(800,1200) 792.56,1207.44 678.83,1207.44 670.04,1216.23 670.04,1265.04 818.3,1413.3 M_R.6@818.3,1764.92 ; v1(835,3059) 835,3052.8 946.3,2941.5 M_R.16@946.3,1994.92 ; MOSP7.2@937.01,324.8 937.01,403.54 953.54,403.54 1013,463 v1(1013,477) ; H2.38@1550,2135 1594.49,2090.51 v1(1594.49,1890) ; 319_0.2@1664.17,133.86 1664.17,221.17 1742,299 v1(1789,299) 1789,344.35 1805,360.35 R200.1@1801.18,364.17 R201.1@1801.18,462.6 ; v1(1708,2472) 1706,2474 1706,2866 v1(1775,2935) ; v1(1726,1037) 1772.65,1037 M_C.16@1804.29,1005.35 ; 810_2.1@1764.17,3513.78 1781.5,3496.46 1779,3493.96 v1(1779,3357) ; M_C.6@2034.29,877.35 2089.08,877.35 2118.43,848 2155,848 2190,883 2190,983 v1(2135,1038) ; v1@2163,470 2163,425.58 2271.58,317 2276,317 v1(2276,234) ; v1@3141,3426.43 3142,3427.43 v1(3142,3440) ; H1.1@3250,1665 3250,1565 3261,1554 v1(3272,1554) ; v1(3305,1900) 3395,1990 3520.31,1990 319_2.2@3527.56,1997.24
  other v1: 2163,466 3204,3054 2700,3440
pads on no net: H1.3 H1.4 H1.5 H1.8 H1.9 H1.14 H1.21 H1.22 H1.23 H1.24 H1.25 H1.26 H1.27 H1.28 H1.29 H1.30 H1.31 H1.32 H1.33 H1.34 H1.35 H1.36 H1.37 H1.38 H1.39 H1.40 H2.1 H2.2 H2.3 H2.4 H2.5 H2.6 H2.7 H2.8 H2.9 H2.10 H2.11 H2.12 H2.13 H2.14 H2.15 H2.16 H2.17 H2.18 H2.19 H2.20 H2.21 H2.22 H2.23 H2.24 H2.33 H2.34 H2.37 M_C.3 M_R.3

## Polygon pours and split planes (outlines as drawn)
VCC on VCC Plane (split plane): 3540.76,3443.83 3540.76,2363.26 3496.05,2318.55 3381,2318.55 3380.02,2318.36 3379.2,2317.8 3272.2,2210.8 3271.65,2209.98 3271.45,2209 3271.45,2149 3271.65,2148.03 3271.87,2147.7 3272.2,2147.2 3403.48,2015.91 3404.31,2015.36 3405.28,2015.17 3493.04,2015.17 3540.76,1967.45 3540.76,1718.36 3448.21,1625.82 3298.1,1475.7 3297.55,1474.88 3297.35,1473.9 3297.35,1421.1 3297.55,1420.12 3298.1,1419.3 3336.2,1381.2 3337.02,1380.64 3338,1380.45 3381,1380.45 3381.98,1380.64 3382.8,1381.2 3433.06,1431.45 3570.94,1431.45 3597.45,1404.95 3597.45,303.81 3541.51,247.87 3417.19,123.55 2537.54,123.55 2314.79,346.29 2265.58,395.5 2264.76,396.06 2263.78,396.25 2057.09,396.25 2056.11,396.06 2055.28,395.5 2015.91,356.13 2015.36,355.31 2015.17,354.33 2015.17,148.69 1967.45,100.97 1674.28,100.97 1626.57,148.69 1626.57,344.49 1626.37,345.46 1625.82,346.29 1576.61,395.5 1575.78,396.06 1574.8,396.25 1377.95,396.25 1376.98,396.06 1376.15,395.5 1326.94,346.29 1326.39,345.46 1326.19,344.49 1326.19,148.69 1278.47,100.97 337.63,100.97 240.7,197.91 240.7,349.85 240.51,350.83 239.95,351.65 112.55,479.06 112.55,1169.94 250.8,1308.2 304.8,1362.2 305.36,1363.02 305.55,1364 305.55,1412 305.36,1412.98 304.8,1413.8 216.38,1502.22 100.97,1617.63 100.97,2087.37 277.8,2264.2 278.36,2265.02 278.55,2266 278.55,2319 278.36,2319.98 277.8,2320.8 234.8,2363.8 233.98,2364.36 233,2364.55 150.06,2364.55 100.97,2413.63 100.97,3443.83 197.91,3540.76 1327.68,3540.76 1375.4,3493.04 1375.4,3297.24 1375.6,3296.27 1376.15,3295.44 1414.4,3257.2 1415.22,3256.65 1416.2,3256.45 1471.11,3256.45 1472.09,3256.65 1472.91,3257.2 1658.17,3442.45 1863.94,3442.45 1882.77,3423.62 1882.64,3423.43 1882.45,3422.45 1882.45,2740 1882.64,2739.02 1883.2,2738.2 1926.2,2695.2 1927.02,2694.64 1928,2694.45 1986,2694.45 1986.98,2694.64 1987.8,2695.2 2191.8,2899.2 2192.36,2900.02 2192.55,2901 2192.55,3178.94 2314.79,3301.19 2315.35,3302.02 2315.54,3302.99 2315.54,3493.04 2363.26,3540.76 3443.83,3540.76
18V on VCC Plane (split plane): 3641.32,20.1 20.1,20.1 20.1,3641.32 3641.32,3641.32
GND on GND Plane (split plane): 3641.32,20.1 20.1,20.1 20.1,3641.32 3641.32,3641.32

## Other copper
VCC Plane (plane layer: these items are gaps in the copper):
  lines w5: 1885,3422.45 1885,2740 1928,2697 1986,2697 2190,2901 2190,3180 2312.99,3302.99 2312.99,3494.09 2362.2,3543.31 3444.88,3543.31 3543.31,3444.88 3543.31,2362.2 3497.1,2316 3381,2316 3274,2209 3274,2149 3405.28,2017.72 3494.09,2017.72 3543.31,1968.5 3543.31,1717.3 3450.02,1624.02 3299.9,1473.9 3299.9,1421.1 3338,1383 3381,1383 3432,1434 3499,1434 3572,1434 3600,1406 3600,302.76 3543.31,246.06 3418.24,121 2536.48,121 2312.99,344.49 2263.78,393.7 2057.09,393.7 2017.72,354.33 2017.72,147.64 1968.5,98.43 1673.23,98.43 1624.02,147.64 1624.02,344.49 1574.8,393.7 1377.95,393.7 1328.74,344.49 1328.74,147.64 1279.53,98.43 336.57,98.43 238.15,196.85 238.15,349.85 110,478 110,1171 249,1310 303,1364 303,1412 214.58,1500.42 98.43,1616.57 98.43,2088.43 276,2266 276,2319 233,2362 149,2362 98.43,2412.57 98.43,3444.88 196.85,3543.31 1328.74,3543.31 1377.95,3494.09 1377.95,3297.24 1416.2,3259 1471.11,3259 1657.11,3445 1865,3445 1885,3425

## Silkscreen, mask and mechanical layers (free items; w line width, h text height)
Top Overlay:
  the board outline again, w5
BoardCutout:
  lines w47.24: -23.62,0 ccw(c0,0) 0,-23.62 ; -23.62,0 ccw(c0,0) 0,-23.62 ; -23.62,0 -23.62,3661.42 ; -23.62,3661.42 cw(c0,3661.42) 0,3685.04 ; -23.62,3661.42 cw(c0,3661.42) 0,3685.04 ; 0,-23.62 3661.42,-23.62 ; 0,3685.04 3661.42,3685.04 ; 3661.42,-23.62 ccw(c3661.42,0) 3685.04,0 ; 3661.42,-23.62 ccw(c3661.42,0) 3685.04,0 ; 3661.42,3685.04 cw(c3661.42,3661.42) 3685.04,3661.42 ; 3661.42,3685.04 cw(c3661.42,3661.42) 3685.04,3661.42 ; 3685.04,0 3685.04,3661.42